# Altium PCB Main.PcbDoc
Units mil, origin at the board's own origin, x right, y up, seen from the top; angles counter-clockwise.
Board outline 3050 x 1750 mil, 4 copper layers (Top Layer, GND, 5V0, Bottom Layer), stack 23.756 mil thick; 22 components, 31 nets, 140 pads, 35 vias.
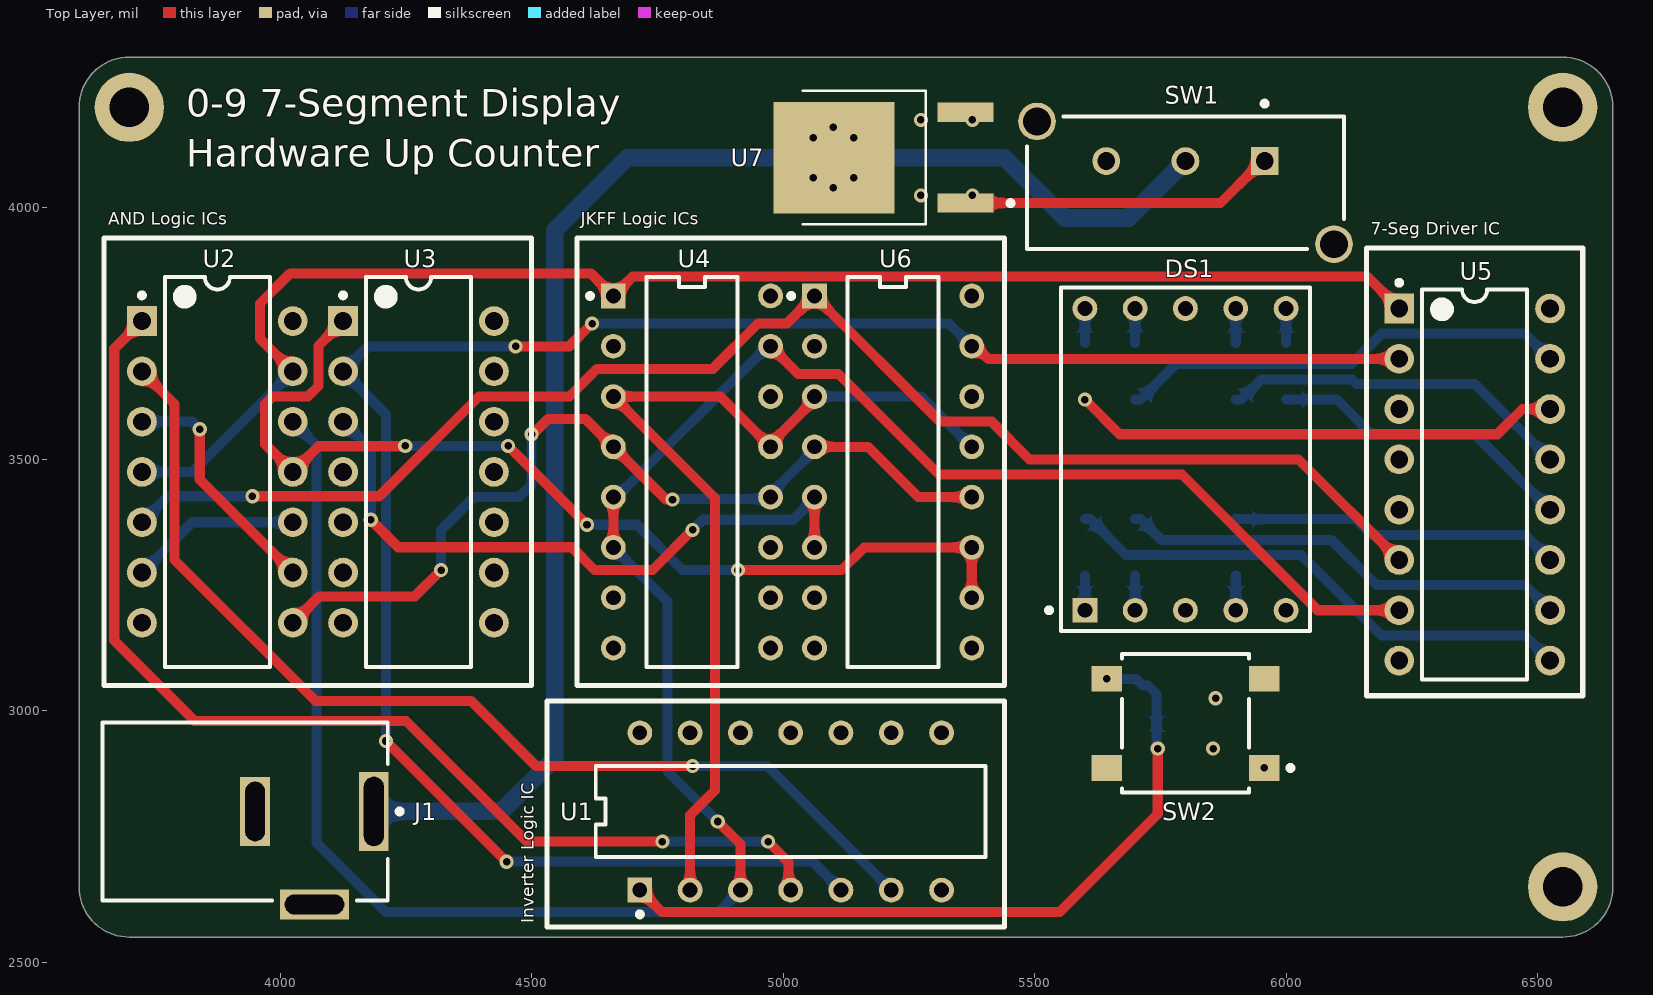
[diagram p0: Top Layer view]
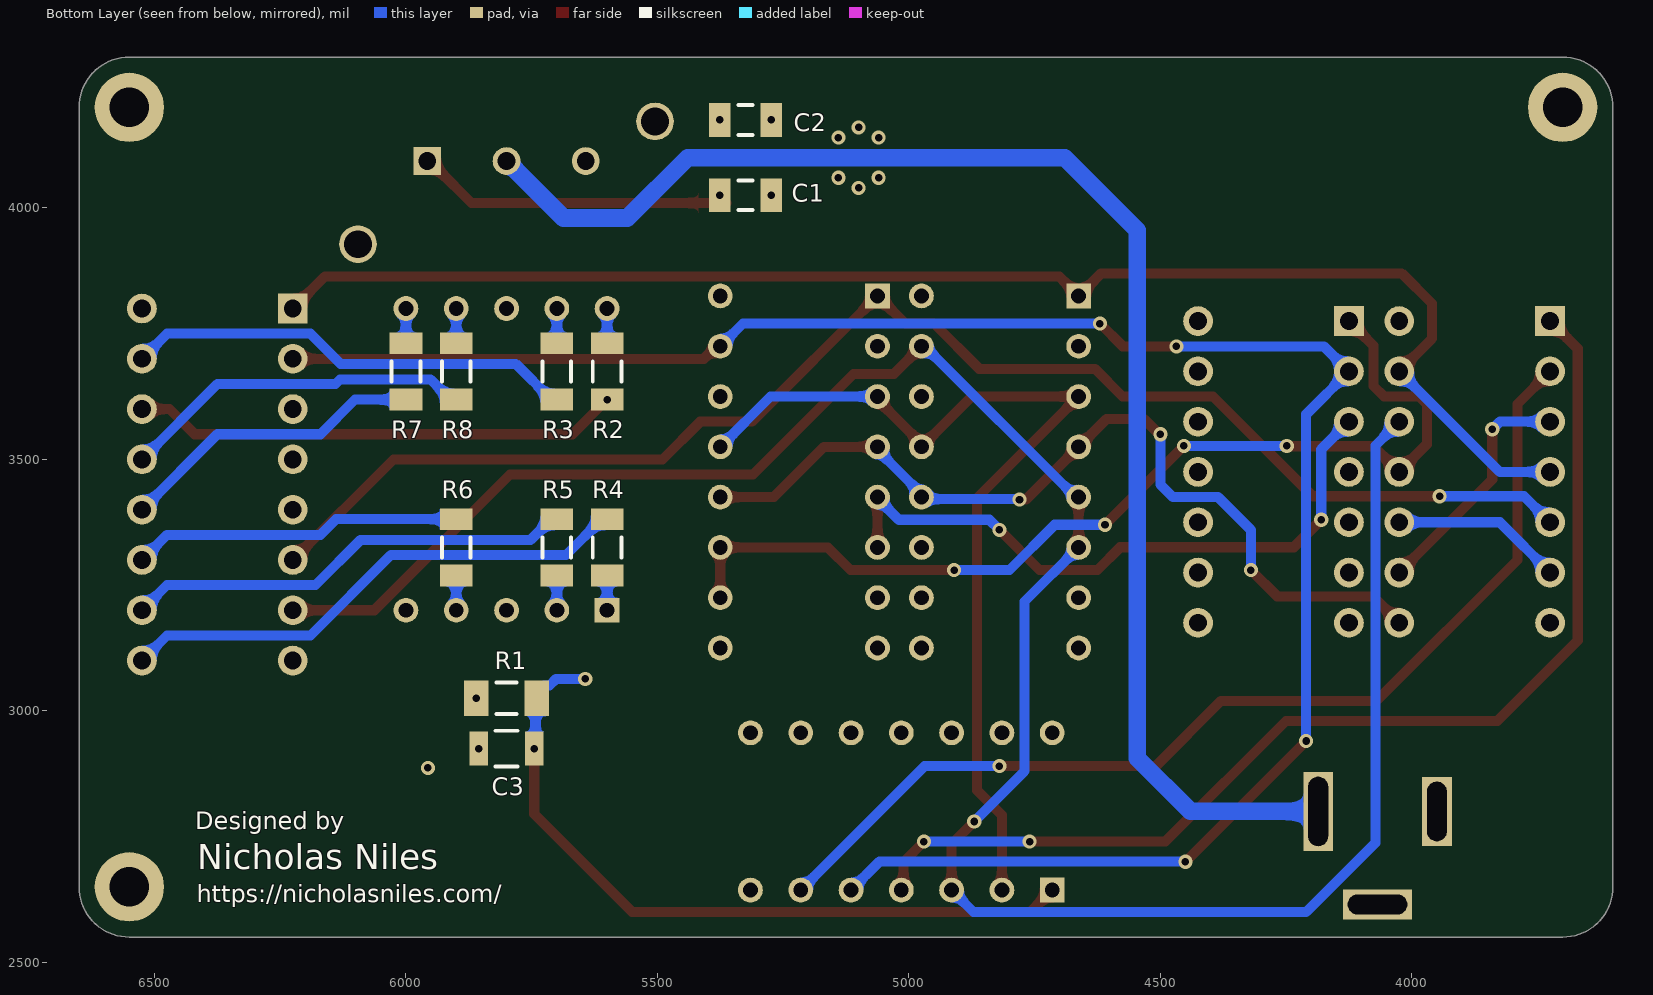
[diagram p1: Bottom Layer view, seen from below]
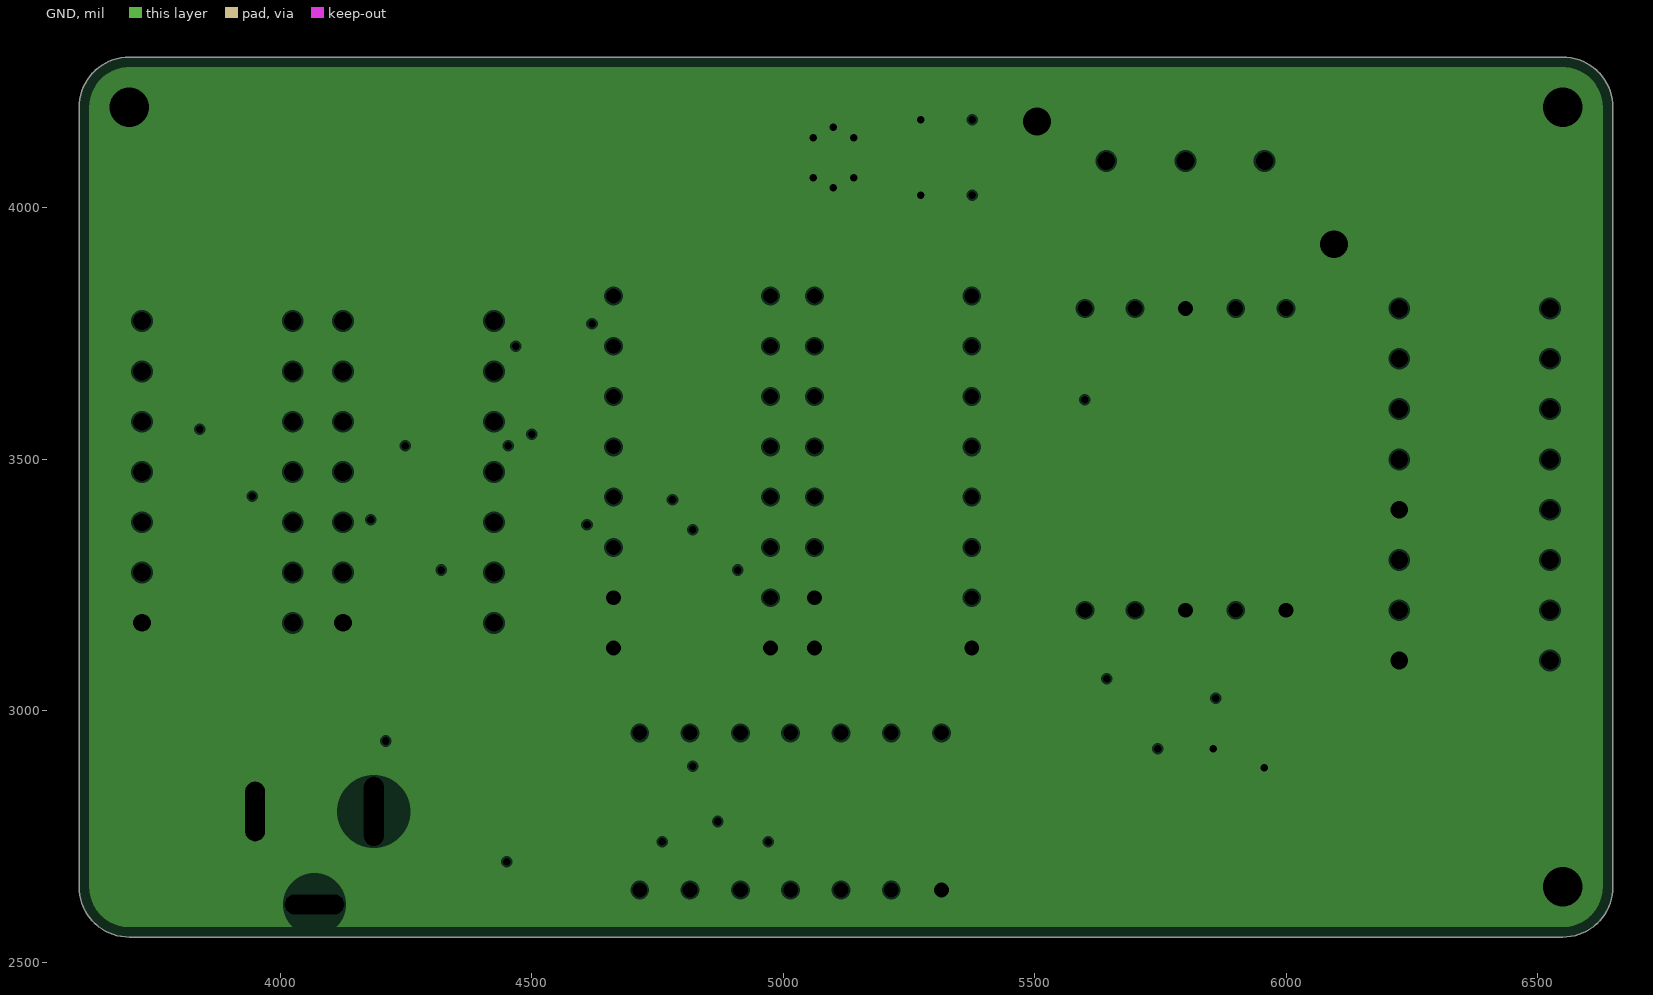
[diagram p2: GND, clearances drawn from the general rule]
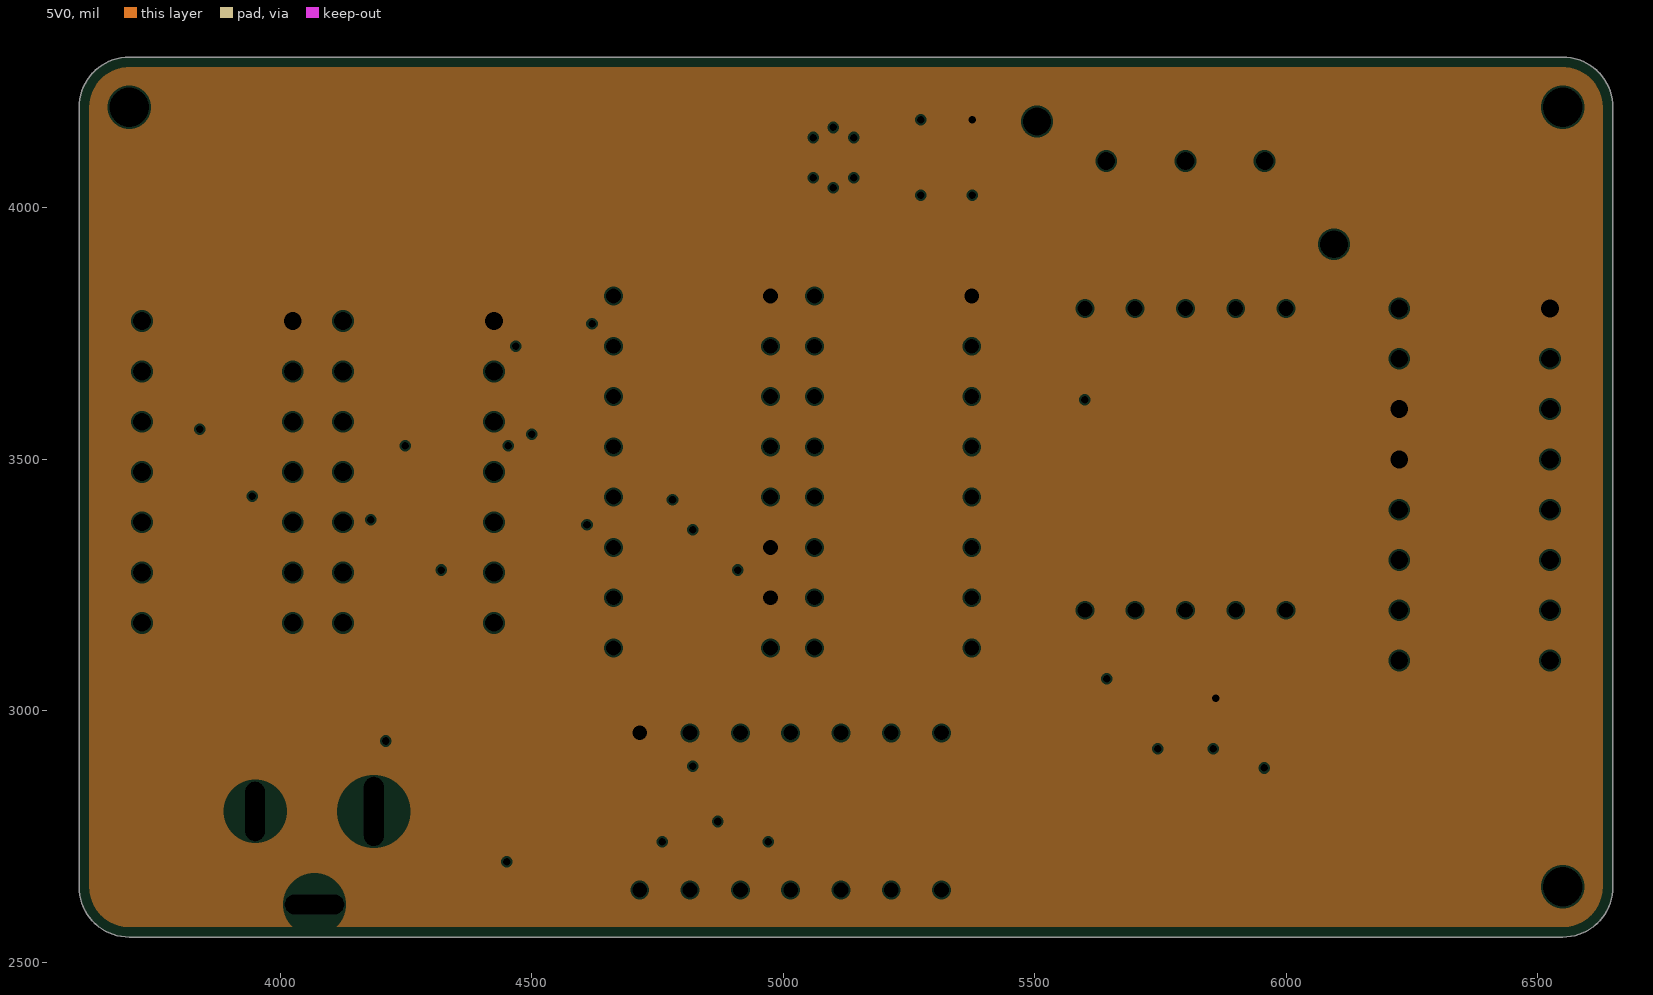
[diagram p3: 5V0, clearances drawn from the general rule]
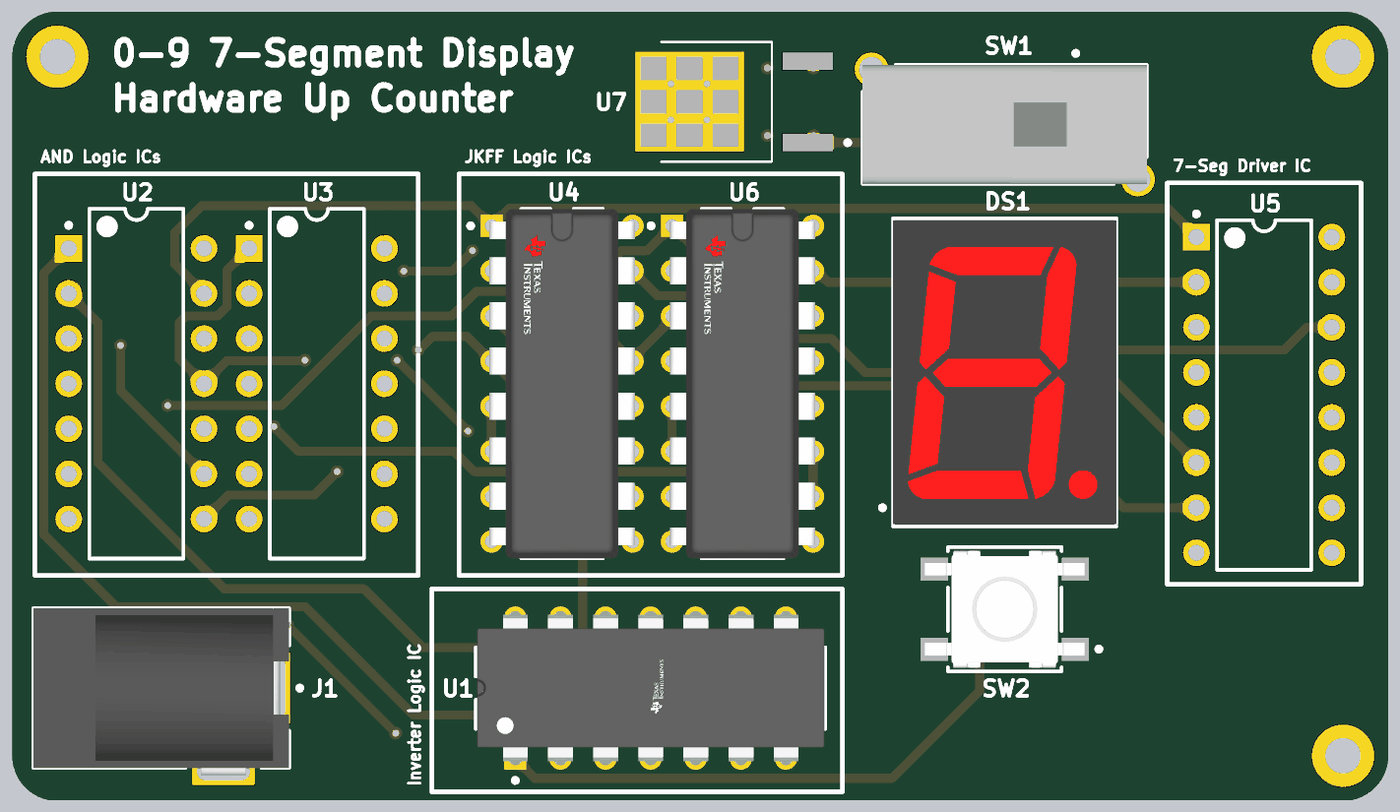
[diagram p4: 3D render of the assembled board from above, using the file's embedded part models]

## Layer stack, top to bottom
Top Solder: solder mask 0.4, Solder Resist, Dk 3.5
Top Layer: signal copper 1.4
Dielectric 2: prepreg 2.8, PP-006, Dk 4.1
GND: plane copper 1.378, net GND
Dielectric 1: dielectric 12.6, FR-4, Dk 4.8
5V0: plane copper 1.378, net 5V0
Dielectric 3: prepreg 2.8, PP-006, Dk 4.1
Bottom Layer: signal copper 1.4
Bottom Solder: solder mask 0.4, Solder Resist, Dk 3.5

## Board outline
3600,2650 3600,4200 cw(c3700,4200) 3700,4300 6550,4300 cw(c6550,4200) 6650,4200 6650,2650 cw(c6550,2650) 6550,2550 3700,2550 cw(c3700,2650)

## Design rules (kind name [scope] priority, off if disabled: settings)
BoardOutlineClearance [All] p1: gap=7.87 ignorepadtopadclearanceinfootprint=FALSE
Clearance [All] p1: gap=4 ignorepadtopadclearanceinfootprint=TRUE except(5: Arc-Via Track-Via SMDPad-Via THPad-Via Via-Via Via-Fill Via-Poly Via-Region Via-Text; 10: Arc-Hole Track-Hole SMDPad-Hole THPad-Hole Via-Hole Fill-Hole Poly-Hole Region-Hole Text-Hole)
ComponentClearance [All] p1: gap=4 collisioncheckmode=3 verticalgap=4 showdistances=TRUE
DiffPairsRouting [All] p1: maxlimit=4 minlimit=4 mostfreqgap=4 toplayer_minwidth=4 toplayer_maxwidth=71497.94 toplayer_prefwidth=4 bottomlayer_minwidth=4 bottomlayer_maxwidth=71497.94 bottomlayer_prefwidth=4 maxuncoupledlength=500
Height [All] p1: minheight=0 maxheight=71497.94 prefheight=500
HoleSize [All] p1: absolutevalues=TRUE maxlimit=248.03 minlimit=7.87 maxpercent=80.000 minpercent=20.000
HoleToHoleClearance [All] p1: gap=10 allowstackedmicrovias=FALSE
MinimumAnnularRing [All] p1: minimumring=6
MinimumSolderMaskSliver [All] p1: minsoldermaskwidth=6
PlaneClearance [All] p1: clearance=4
PlaneConnect PlaneConnectPowerPads [InPadClass('PowerPads')] p1: planeconnectstyle=Direct reliefexpansion=20 reliefentries=4 reliefconductorwidth=10 reliefairgap=10
PlaneConnect [All] p2: pad.planeconnectstyle=Relief pad.reliefexpansion=11.81 pad.reliefentries=4 pad.reliefconductorwidth=4 pad.reliefairgap=4 via.planeconnectstyle=Direct via.reliefexpansion=11.81 via.reliefentries=4 via.reliefconductorwidth=5 via.reliefairgap=5
PolygonConnect PolygonConnectPowerPads [All vs (InPadClass('PowerPads'))] p1: connectstyle=Direct reliefconductorwidth=10 reliefentries=4 polygonreliefangle="90 Angle" airgapwidth=10
PolygonConnect [All] p2: thpad.connectstyle=Relief thpad.reliefconductorwidth=4 thpad.reliefentries=4 thpad.polygonreliefangle="90 Angle" thpad.airgapwidth=4 smdpad.connectstyle=Relief smdpad.reliefconductorwidth=4 smdpad.reliefentries=4 smdpad.polygonreliefangle="90 Angle" smdpad.airgapwidth=4 via.connectstyle=Direct via.reliefconductorwidth=5 via.reliefentries=4 via.polygonreliefangle="90 Angle" via.airgapwidth=5
RoutingVias [All] p1: holewidth=7.87 width=17.72 viastyle="Through Hole" minholewidth=7.87 minwidth=17.72 maxholewidth=248.03 maxwidth=257.87
SilkToSilkClearance [All] p1: silktosilkclearance=5
SilkToSolderMaskClearance [IsPad] p1: minsilkscreentomaskgap=5 clearancetoexposedcopper=TRUE
SolderMaskExpansion [All] p1: expansion=2 istentingtop=FALSE
SupplyNets "Schematic Supply Nets_2" [InNet('Vin')] p1: voltage=0.000
SupplyNets "Schematic Supply Nets_1" [InNet('GND')] p2: voltage=0.000
SupplyNets "Schematic Supply Nets" [InNet('5V0')] p3: voltage=0.000
UnRoutedNet [All] p1: checkbadconnections=TRUE
Width Power_20mil [All] p1: maxlimit=1000 minlimit=20 preferedwidth=20 minimp=50.000000 maximp=50.000000 favimp=50.000000
Width Power_12mil [All] p2: maxlimit=1000 minlimit=12 preferedwidth=12 minimp=50.000000 maximp=50.000000 favimp=50.000000
Width Width_10mil [All] p3: maxlimit=1000 minlimit=10 preferedwidth=10 minimp=50.000000 maximp=50.000000 favimp=50.000000
Width Width_6mil [All] p4: maxlimit=1000 minlimit=6 preferedwidth=6 minimp=50.000000 maximp=50.000000 favimp=50.000000
Width Width_4mil [All] p5: maxlimit=1000 minlimit=4 preferedwidth=4 minimp=50.000000 maximp=50.000000 favimp=50.000000
19 further rules are at their usual default settings.

## Components (designator, comment, footprint, x,y, rotation, side; value= is the part's Value field where it differs from the comment)
C1 "1µF" CAPC3216X110X50LL20T25 5325,4025 r180 bottom
C2 "1µF" CAPC3216X110X50LL20T25 5325,4175 r180 bottom
C3 "100nF" FP-C1206C-EB-MFG 5800,2925 r0 bottom value="0.10 μF"
DS1 "HDSP-H153" FP-HDSP-H153-MFG 5800,3500 r0 top
J1 "PJ-002A" CUI-PJ-002A_V 4068.11,2800 r180 top
R1 "10kΩ" RESC3116X65X40ML10T20 5800,3025 r0 bottom
R2 "330Ω" RESC3216X70X50NL05T20 5600,3675 r270 bottom
R3 "330Ω" RESC3216X70X50NL05T20 5700,3675 r270 bottom
R4 "330Ω" RESC3216X70X50NL05T20 5600,3325 r90 bottom
R5 "330Ω" RESC3216X70X50NL05T20 5700,3325 r90 bottom
R6 "330Ω" RESC3216X70X50NL05T20 5900,3325 r90 bottom
R7 "330Ω" RESC3216X70X50NL05T20 6000,3675 r270 bottom
R8 "330Ω" RESC3216X70X50NL05T20 5900,3675 r270 bottom
SW1 "1825255-1" TECO-1825255-1_V 5800,4050 r180 top
SW2 "B3S-1000P" FP-B3S-1000P-MFG 5800,2975 r180 top
U1 "SN74HCT14N" FP-N0014A-MFG 5015,2800 r90 top
U2 "SN74HC08N" N0014A 3875,3475 r0 top
U3 "SN74HC08N" N0014A 4275,3475 r0 top
U4 "CD4027BE" FP-N0016A-MFG 4818.7,3475 r0 top
U5 "CD74HCT4511E" N0016A 6375,3450 r0 top
U6 "CD4027BE" FP-N0016A-MFG 5218.7,3475 r0 top
U7 "VIN->5V0" DPAK229P990X238-4N 5200,4100 r90 top

## Footprints (in the part's own frame and the unit in brackets; to place one, negate y for a bottom-side part, rotate by r counter-clockwise, add the part's x,y. Pads: shape width x height; smd on the part's side, far side on the other; paste and mask are expansions set on the pad)
CAPC3216X110X50LL20T25 [mm] "Chip Capacitor, 2-Leads, Body 3.20x1.60mm, IPC High Density"
  rect 1.1x1.7 smd: 1(-1.3,0) 2(1.3,0)
  silkscreen extent -0.35,-0.75 0.35,0.75, body extent -1.7,-0.9 1.7,0.9, height 1.1
CUI-PJ-002A_V [mm] "THD, 3-Leads, Body 14.4x9mm, Height 11mm"
  rect 1.5x4 hole 1 slot 3.5 at 90 deg: 1(-3,0)
  rect 1.5x3.5 hole 1 slot 3 at 90 deg: 2(3,0)
  rect 3.5x1.5 hole 1 slot 3 at 0 deg: 3(0,4.7)
  silkscreen extent -4.43,-4.5 10.7,4.5, body extent -3.7,-4.5 10.7,4.9, height 11
DPAK229P990X238-4N [mm]
  rect 0.97x2.83 smd: 1(-2.29,-4.14) 3(2.29,-4.14)
  rect 5.63x6.09 smd paste-4: 2(0,2.51)
  silkscreen extent -3.37,-6.5 3.37,4.09
FP-B3S-1000P-MFG [mm]
  rect 1.55x1.3 smd paste+0 mask+0: 1(-3.975,2.25) 2(3.975,2.25) 3(-3.975,-2.25) 4(3.975,-2.25)
  silkscreen extent -5.43,-3.5 3.2,3.5, body extent -4.85,-3.6 4.85,3.6, height 0.25
FP-C1206C-EB-MFG [mm]
  rect 0.95x1.7 smd paste+0 mask+0: 1(-1.4,0) 2(1.4,0)
  silkscreen extent -0.55,-0.9 0.55,0.9, body extent -1.6,-0.8 1.6,0.8, height 0.88
FP-HDSP-H153-MFG [mm]
  rect 1.25x1.25 hole 0.75 paste-2539.97 mask+0: 1(-5.08,-7.62)
  round 1.25 hole 0.75 paste-2539.97 mask+0: 2(-2.54,-7.62) 3(0,-7.62) 4(2.54,-7.62) 5(5.08,-7.62) 6(5.08,7.62) 7(2.54,7.62) 8(0,7.62) 9(-2.54,7.62) 10(-5.08,7.62)
  silkscreen extent -7.01,-8.67 6.29,8.67, body extent -6.39,-8.77 6.39,8.77, height 0.25
FP-N0014A-MFG [mm]
  rect 1.25x1.25 hole 0.75 paste-2539.97 mask+0: 1(-3.97,7.62)
  round 1.25 hole 0.75 paste-2539.97 mask+0: 2(-3.97,5.08) 3(-3.97,2.54) 4(-3.97,0) 5(-3.97,-2.54) 6(-3.97,-5.08) 7(-3.97,-7.62) 8(3.97,-7.62) 9(3.97,-5.08) 10(3.97,-2.54) 11(3.97,0) 12(3.97,2.54) 13(3.97,5.08) 14(3.97,7.62)
  silkscreen extent -5.32,-9.84 2.3,9.84, body extent -4.69,-9.94 4.69,9.94, height 0.25
FP-N0016A-MFG [mm]
  rect 1.25x1.25 hole 0.75 paste-2539.97 mask+0: 1(-3.97,8.89)
  round 1.25 hole 0.75 paste-2539.97 mask+0: 2(-3.97,6.35) 3(-3.97,3.81) 4(-3.97,1.27) 5(-3.97,-1.27) 6(-3.97,-3.81) 7(-3.97,-6.35) 8(-3.97,-8.89) 9(3.97,-8.89) 10(3.97,-6.35) 11(3.97,-3.81) 12(3.97,-1.27) 13(3.97,1.27) 14(3.97,3.81) 15(3.97,6.35) 16(3.97,8.89)
  silkscreen extent -5.27,-9.84 2.3,9.84, body extent -4.69,-9.94 4.69,9.94, height 0.25
N0014A [mm] "DIP, 14-Leads, Body 19.7x6.6mm, Pitch 2.54mm"
  rect 1.5x1.5 hole 0.9: 1(-3.81,7.62)
  round 1.5 hole 0.9: 2(-3.81,5.08) 3(-3.81,2.54) 4(-3.81,0) 5(-3.81,-2.54) 6(-3.81,-5.08) 7(-3.81,-7.62) 8(3.81,-7.62) 9(3.81,-5.08) 10(3.81,-2.54) 11(3.81,0) 12(3.81,2.54) 13(3.81,5.08) 14(3.81,7.62)
  silkscreen extent -3.93,-9.85 2.65,9.85, body extent -3.95,-9.85 3.95,9.85, height 5.08
N0016A [mm] "DIP, 16-Leads, Body 19.7x6.6mm, Pitch 2.54mm"
  rect 1.5x1.5 hole 0.9: 1(-3.81,8.89)
  round 1.5 hole 0.9: 2(-3.81,6.35) 3(-3.81,3.81) 4(-3.81,1.27) 5(-3.81,-1.27) 6(-3.81,-3.81) 7(-3.81,-6.35) 8(-3.81,-8.89) 9(3.81,-8.89) 10(3.81,-6.35) 11(3.81,-3.81) 12(3.81,-1.27) 13(3.81,1.27) 14(3.81,3.81) 15(3.81,6.35) 16(3.81,8.89)
  silkscreen extent -3.93,-9.85 2.65,10.31, body extent -3.95,-9.85 3.95,9.85, height 5.08
RESC3116X65X40ML10T20 [mm] "Chip Resistor, 2-Leads, Body 3.10x1.60mm, IPC Low Density"
  rect 1.25x1.8 smd: 1(-1.525,0) 2(1.525,0)
  silkscreen extent -0.5,-0.8 0.5,0.8, body extent -1.6,-0.85 1.6,0.85, height 0.65
RESC3216X70X50NL05T20 [mm] "Chip Resistor, 2-Leads, Body 3.20x1.60mm, IPC Medium Density"
  rect 1.1x1.65 smd: 1(-1.425,0) 2(1.425,0)
  silkscreen extent -0.5,-0.72 0.5,0.72, body extent -1.63,-0.82 1.62,0.82, height 0.7
TECO-1825255-1_V [mm] "THD, 5-Leads, Body 6.7x16mm, Pitch 4mm"
  rect 1.4x1.4 hole 0.9: 1(-4,-1.1)
  round 1.4 hole 0.9: 2(0,-1.1) 3(4,-1.1)
  round 1.9 hole 1.4: MH1(-7.5,3.1) MH2(7.5,-3.1)
  silkscreen extent -8,-4.12 8,3.35, body extent -8,-3.35 8,3.35, height 12

## Part data
C1 C2: library part CMP-2000-06011-1, "Chip Capacitor, 1 uF, +/- 10%, 50 V, -55 to 125 degC, 1206 (3216 Metric), RoHS, Tape and Reel", Capacitance=1uF, Capacitance - nF=1000nF, Case Code - in=1206, Case Code - mm=3216, Case Height=1mm, Case Length=3.2mm, Case Width=1.6mm, Dielectric=X7R, Manufacturer=Kemet, Maximum Operating Temperature=+125C, Minimum Operating Temperature=-55C, Operating Temperature Range=-55Cto+125C, Package / Case=1206(3216metric), Package Description="2-Pin Surface Mount Device, Body 3.2 x 1.6 mm", Temperature Coefficient / Code=+/-15%, Tolerance=10%, Voltage Rating=50V, Brand=Kemet, Class=Class1, Datasheet URL=http://www.kemet.com/docfinder?Partnumber=C1206C105K5RACTU, Datasheet Version=02/2016, Dimensions=1.6mmWx3.2mmLx1mmH, Factory Pack Quantity=2500, Manufacturer URL=http://www.kemet.com/, Mounting Technology=SurfaceMount, Package Reference=1206, Packaging=Reel, Product=GeneralTypeMLCCs, Product Category=MultilayerCeramicCapacitorsMLCC-SMD/SMT, RoHS=Details, Series=C1206C, Termination Style=SMD/SMT, Type=SMDMLCCX7R6.3-250VDCCommericalGrade, Voltage Rating DC=50V
C3: library part CMP-1037-04222-2, "CAP CER 0.1UF 200V 10% X7R 1206", Capacitance="0.10 μF", Manufacturer=KEMET, Manufacturer Part Number=C1206C104K2RACTU, Package=C1206C-EB, Temperature="-55°C to +150°C", Temperature Characteristic=X7R, Temperature Coefficient=15%, Temperature Range High=+150°C, Temperature Range Low=-55°C, Tolerance=0.1, Voltage Rating="200 V", Automotive=Yes, Automotive Grade="Grade 0", Category=Cap, ComponentLink2Description=Datasheet, ComponentLink2URL=https://content.kemet.com/datasheets/KEM_C1007_X8R_ULTRA_150C_SMD.pdf, Device Class L1="Passive Components", Device Class L2=Capacitors, Device Class L3="Ceramic Capacitors", Digikey Description="CAP CER 0.1UF 200V 10% X7R 1206", Height=0.88mm, Ipc Land Pattern Name=CAPC320160X78, Lead Free=Yes, Material=Ceramic, Mouser Description="Multilayer Ceramic Capacitors MLCC - SMD/SMT 200volts 0.1uF X7R 10%", Octopart=https://octopart.com/c1206c104k2ractu-kemet-9138344, RoHS=TRUE
DS1: library part CMP-18395-000002-1, "LED 7-SEG 14.2MM CC RED RHD RHD", Forward Current=100mA, Forward Voltage=2V, Manufacturer=Broadcom, Power Dissipation=96mW, Reverse Voltage=15V, Temperature="-20°C to +100°C", Temperature Range High=+100°C, Temperature Range Low=-20°C, Automotive=No, Category=Disp, ComponentLink2Description=Datasheet, ComponentLink2URL=https://docs.broadcom.com/docs/AV02-1107EN, Device Class L1=Optoelectronics, Device Class L2=Displays, Device Class L3="LED Displays", Digikey Description="LED 7-SEG 14.2MM CC RED RHD RHD", Display Type=LED, Element Config="Common Cathode", Height=8mm, Lead Free=Yes, Luminous Intensity=16mcd, Manufacturer Part Number=HDSP-H153, Octopart=https://octopart.com/hdsp-h153-broadcom-71129578, Package=HDSP-H153, RoHS=TRUE, Standoff Height=1.14mm, Test Current=100mA, Viewing Angle=100°, Wavelength=637nm
J1: library part CMP-2000-06895-2, "Through Hole Right Angle DC Power Jack, 2.5 A, 2 mm Center Pin, 3 Position, -25 to 85 degC, RoHS, Bulk", Current Rating=2.5A, Flammability Rating=UL94V-0, Insulation Resistance=50MOhms, Manufacturer=CUIInc., Operating Temperature Range=-25Cto+85C, Package Description="3-Pin Through Hole Device, Body 14.4 x 9 mm, Height 11 mm", Voltage Rating=24V, Brand=CUI, Connector Type=DCPowerJack, Contact Gender=Male, Contact Material=Copper, Contact Plating=Nickel, Datasheet URL=http://www.cui.com/product/resource/pj-002a.pdf, Datasheet Version="Rev. 1.03, 04/2016", Factory Pack Quantity=500, Housing Material=PolybutyleneTerephthalate(PBT), Inside Contact Diameter=2mm, Manufacturer URL=http://www.cui.com/, Mounting Angle=Right, Mounting Style=ThroughHole, Mounting Technology=ThroughHole, Outside Contact Diameter=6.5mm, Package Reference=PJ-002A, Product=Jacks, Product Category=DCPowerConnectors, RoHS=True, Termination Style=ThroughHole
R1: library part CMP-1014-00623-2, "Chip Resistor, 10 KOhm, +/- 1%, 0.25 W, -55 to 155 degC, 1206 (3216 Metric), RoHS, Tape and Reel", Case Code (Imperial)=1206, Case Code (Metric)=3216, Manufacturer=Yageo, Max Operating Temperature=155degC, Min Operating Temperature=-55degC, Package Description="2-Pin Surface Mount Device, Body 3.1 x 1.6 mm", Package Quantity=5000, Package Reference=1206.0, Power Rating=250mW, Resistance=10KOhm, Temperature Coefficient=100ppm/degreesC, Tolerance=1%, Voltage Rating=200V, Case/Package=1206, Composition=ThickFilm, Datasheet URL=http://www.yageo.com/NewPortal/yageodocoutput?fileName=/pdf/R-Chip/PYu-RC_Group_51_RoHS_L_5.pdf, Datasheet Version="Rev. 5, 10/2016", Depth=1.6mm, Height=0.55mm, Lead Free=LeadFree, Length=3.1mm, Manufacturer URL=http://www.yageo.com/, Military Standard=Not, Packaging=TapeandReel, REACH SVHC=Unknown, RoHSCompliant=true, Termination=SMD/SMT, Width=1.6mm
R2 R3 R4 R5 R6 R7 R8: library part CMP-2003-00307-1, Manufacturer=Panasonic, Part Number=ERJ8ENF3300V
SW1: library part CMP-2100-03576-1, "Slide Switch, SPDT, 125 V, -20 to 85 degC, 5-Pin THD, RoHS, Tray", Case/Package=300, Current Rating=300mA, Flammability Rating=UL94HB, Manufacturer="TE Connectivity", Max Operating Temperature=85degC, Max Voltage Rating (AC)=125V, Min Operating Temperature=-20degC, Operating Force=600gf, Package Description="5-Pin Through Hole Device, Body 6.7 x 16 mm, Pitch 4 mm", Package Quantity=560, Actuator Length=4.5mm, Contact Material=Copper, Contact Plating=Silver, Contact Style=Shorting, Datasheet URL=http://www.te.com/commerce/DocumentDelivery/DDEController?Action=showdoc&DocId=Customer+Drawing%7F1825255%7FA4%7Fpdf%7FEnglish%7FENG_CD_1825255_A4_baseFilename.pdf%7F1825255-1, Datasheet Version="Rev. A4, 03/2014", Depth=6.7mm, Electrical Life=15000Cycles, ELV=Compliant, Lead Free=LeadFree, Length=16mm, Manufacturer URL=http://www.te.com/, Max Current Rating=300mA, Mount=ThroughHole, Number of Positions=2, Orientation=Vertical, Package Reference=1825255-1, Packaging=Bulk, Radiation Hardening=No, REACH SVHC=Unknown, RoHSCompliant=true, Switch Travel=4mm, Termination=PCPins, Throw Configuration=SPDT, Voltage Rating (AC)=125V
SW2: library part CMP-08834-000008-1, "SWITCH TACTILE SPST-NO 0.05A 24V", Contact Current Rating=50mA, Contact Resistance=100mR, Max Operating Temperature=70°C, Max Voltage Rating (DC)=24V, Min Operating Temperature=-25°C, Operating Force=1.57N, Package Quantity=1, Ratings=IP67, Actuator Length=0.8mm, Actuator Type=Standard, Contact Material=Bronze, Contact Plating=Silver, Current Rating=50mA, Depth=9mm, Electrical Life=500000Cycles, Height=3.65mm, Illumination Type=Non-Illuminated, Lead Free="Lead Free", Length=6.6mm, Max Current Rating=50mA, Mechanical Life=500000Cycles, Mount="Surface Mount", Number of Poles=1, Orientation=Straight, Packaging="Tape and Reel", Radiation Hardening=No, REACH SVHC="No SVHC", Switch Function=Off-Mom, Switch Travel=0.25mm, Termination="Gull Wing", Throw Configuration=SPST, Voltage Rating (DC)=24V, Weight=0.010582oz, Width=6mm
U1: library part CMP-1615-00871-4, "IC INVERTER SCHMITT 6CH 14DIP", Case/Package=PDIP, High Level Output Current=-4mA, Low Level Output Current=4mA, Max Operating Temperature=85°C, Max Supply Voltage=5.5V, Min Operating Temperature=-40°C, Min Supply Voltage=4.5V, Operating Supply Voltage=5V, Package Quantity=25, Quiescent Current=2uA, Contact Plating=Gold, Height=4.57mm, Input Type="SCHMITT TRIGGER", Lead Free="Lead Free", Length=19.3mm, Logic Function=Buffer, Max Output Current=4mA, Mount="Through Hole", Number of Bits=6, Number of Circuits=6, Number of Elements=6, Number of Gates=6, Number of Inputs=1, Number of Pins=14, Output Current=4mA, Packaging=Rail/Tube, Propagation Delay=30ns, Radiation Hardening=No, REACH SVHC="No SVHC", RoHS Compliant=Yes, Schmitt Trigger Input=Yes, Series=74HCT, Technology=CMOS, Turn-On Delay Time=40ns, Weight=0.032734oz, Width=6.35mm
U2 U3: library part CMP-0777-00250-3, "Quadruple 2-Input Positive-AND Gates, N0014A, TUBE", F @ Nom Voltage(Max)(Mhz)=70, Generic Part Number=SN74HC08, ICC @ Nom Voltage(Max)(mA)=0.02, Manufacturer="Texas Instruments", Operating Temperature Range(C)="-40 to 85", Rating=Catalog, tpd @ Nom Voltage(Max)(ns)=28, Voltage(Nom)(V)=5, Bits(#)=4, DatasheetVersion=SCLS081F, Input Type=CMOS, Output Type=CMOS, PackageReference=N0014A, Schmitt Trigger=No, Technology Family=HC, VCC(Max)(V)=6, VCC(Min)(V)=2
U4 U6: library part CMP-04902-000022-1, "IC FF JK TYPE DUAL 1BIT 16DIP", Case/Package=PDIP, Frequency=24MHz, High Level Output Current=-4.2mA, Input Capacitance=5pF, Low Level Output Current=4.2mA, Max Operating Temperature=125°C, Max Supply Voltage=18V, Min Operating Temperature=-55°C, Min Supply Voltage=3V, Operating Supply Voltage=3.3V, Output Current=6.8mA, Package Quantity=25, Power Dissipation=500mW, Quiescent Current=20uA, Clock Edge Trigger Type="Positive Edge", Contact Plating=Gold, Height=4.57mm, Input Type=SINGLE-ENDED, Lead Free="Lead Free", Length=19.3mm, Logic Function=Flip-Flop, Max Frequency=24MHz, Mount="Through Hole", Number of Bits=2, Number of Bits per Element=1, Number of Circuits=2, Number of Elements=2, Number of Input Lines=2, Number of Output Lines=1, Number of Pins=16, Packaging=Rail/Tube, Polarity=Non-Inverting, Propagation Delay=300ns, Radiation Hardening=No, REACH SVHC="No SVHC", RoHS Compliant=Yes, Series=4000B, Technology=CMOS, Turn-On Delay Time=45ns, Weight=0.03357oz, Width=6.35mm
U5: library part CMP-0388-00318-2, "High Speed CMOS Logic BCD-to-7-Segment Latch / Decoder / Driver, 4.5 to 5.5 V, -55 to 125 degC, 16-pin DIP (N16), Pb-Free (RoHS)", Manufacturer="Texas Instruments", Rating=Catalog, Code_JEDEC=MS-001, ComponentLink1Description="Manufacturer URL", ComponentLink1URL=http://www.ti.com/, ComponentLink2Description=Datasheet, ComponentLink2URL=http://www.ti.com/general/docs/lit/getliterature.tsp?genericPartNumber=CD74HCT4511&fileType=pdf, ComponentLink3Description="Package Specification", ComponentLink3URL=http://www.ti.com/litv/pdf/mpdi002c, DatasheetVersion=SCHS279D, Eco-Plan="Pb-Free (RoHS)", Mounting Technology="Through Hole", PackageDescription="16-Pin Plastic In-Line, Body 19.305 x 6.35 mm, Pitch 2.54 mm", PackageReference=N0016A, PackageVersion=4040049/E, PartNumber=CD74HCT4511E, SubFamily="Discrete Segment LED Driver", Vin(Max)(V)=5.5, Vin(Min)(V)=4.5
U7: library part MC7805BDTRKG, "Linear Voltage Regulator IC 1 Output 1A DPAK", Package="TO-252-3 Freescale Semiconductor", Availability=Unavailable, MF="ON Semiconductor", MP=MC7805BDTRKG, Price=None, SnapEDA_Link=https://www.snapeda.com/parts/MC7805BDTRKG/ON%20Semiconductor/view-part/360207/?ref=snap

## Free pads (board coordinates)
  round 137.79 hole 78.74: 7(3700,4200) 7(6550,2650) 7(6550,4200)

## Via types
v1: diameter 28, hole 15, Top Layer to Bottom Layer, tented both sides, 35 vias

## Nets (pads, with @x,y where several pads share a name; then routed paths per layer and width w, separated by ;. In a path a pad name is that pad's centre, name@x,y a point inside that pad or via, vN(x,y) a via of type N, cw(c..) or ccw(c..) an arc to the next point about the centre after c; other vN are vias at no path point)
5V0: C2.1 R1.2 U1.14 U2.14 U3.14 U4.10 U4.11 U4.16 U5.3 U5.4 U5.16 U6.16 U7.3
  other v1: 5860.04,3025 5376.18,4175
a: DS1.7 R8.1 | length 68.9
  Bottom Layer w20: R8.1 DS1.7
b: DS1.6 R7.1 | length 68.9
  Bottom Layer w20: R7.1 DS1.6
c: DS1.4 R6.1 | length 68.9
  Bottom Layer w20: DS1.4 R6.1
d: DS1.2 R5.1 | length 68.9
  Bottom Layer w20: DS1.2 R5.1
e: DS1.1 R4.1 | length 68.9
  Bottom Layer w20: DS1.1 R4.1
f: DS1.9 R3.1 | length 68.9
  Bottom Layer w20: R3.1 DS1.9
g: DS1.10 R2.1 | length 68.9
  Bottom Layer w20: R2.1 DS1.10
GND: C1.2 C2.2 C3.2 DS1.3 DS1.5 DS1.8 J1.2 pad.7 SW1.MH1 SW1.MH2 SW2.1 U1.7 U2.7 U3.7 U4.7 U4.8 U4.9 U5.5 U5.8 U6.7 U6.8 U6.9 U7.2
  other v1: 5956.5,2886.42 5855.12,2925 5273.82,4025 5100,4040 5060,4060 5140,4060 5060,4140 5140,4140 5100,4160 5273.82,4175
JK[2]: U2.11 U3.1 U6.10 U6.11 | length 2020.5
  Top Layer w20: U3.1 4075.96,3725.96 4075.96,3645.96 4055.4,3625.4 3985.4,3625.4 3970,3610 3970,3530 U2.11 4076.13,3526.13 4247.78,3526.13 v1(4248.64,3526.99) ; v1(4453.01,3526.99) v1(4610,3370) ; v1(4910,3280) 5116.05,3280 5161.05,3325 U6.11 U6.10
  Bottom Layer w20: v1(4248.64,3526.99) v1(4453.01,3526.99) ; v1(4610,3370) 4710,3370 4800,3280 v1(4910,3280)
JK[3]: U3.3 U6.5 U6.6 | length 1303.2
  Top Layer w20: v1(4180,3380) 4234.7,3325.3 4579.7,3325.3 4625,3280 4740,3280 v1(4820,3360) ; U6.6 U6.5
  Bottom Layer w20: U3.3 4180,3520 v1(4180,3380) ; v1(4820,3360) 4840,3380 5020,3380 5062.4,3422.4 U6.5
NetC1_1: C1.1 SW1.1 U7.1 | length 615.3
  Top Layer w20: U7.1 5869.84,4009.84 5935.75,4075.75 5939.92,4075.75 5944.79,4080.61 SW1.1@5944.79,4084.79
  other v1: 5376.18,4025
NetC3_1: C3.1 R1.1 SW2.4 U1.1 | length 1479.6
  Top Layer w20: U1.1 4758.7,2600 5550,2600 5744.88,2794.88 v1(5744.88,2925)
  Bottom Layer w20: v1(5643.5,3063.58) 5701.38,3063.58 5714.53,3050.43 5725.35,3050.43 5742.42,3033.37 5742.42,2927.46 v1(5744.88,2925)
NetR2_2: R2.2 U5.14 | length 974.2
  Top Layer w20: v1(5600,3618.9) 5668.9,3550 6420,3550 6470,3600 U5.14
NetR3_2: R3.2 U5.15 | length 900
  Bottom Layer w20: R3.2 5710.83,3618.9 5781.93,3690 6130,3690 6190,3750 6475,3750 U5.15
NetR4_2: R4.2 U5.9 | length 1041.4
  Bottom Layer w20: R4.2 5610.83,3381.1 5681.93,3310 6030,3310 6190,3150 6475,3150 U5.9
NetR5_2: R5.2 U5.10 | length 900
  Bottom Layer w20: R5.2 5710.83,3381.1 5751.93,3340 6090,3340 6180,3250 6475,3250 U5.10
NetR6_2: R6.2 U5.11 | length 658.6
  Bottom Layer w20: R6.2 6138.9,3381.1 6170,3350 6475,3350 U5.11
NetR7_2: R7.2 U5.12 | length 615.7
  Bottom Layer w20: R7.2 6101.1,3618.9 6170,3550 6375,3550 U5.12
NetR8_2: R8.2 U5.13 | length 707.3
  Bottom Layer w20: R8.2 5910.83,3618.9 5950.76,3658.84 6131.16,3658.84 6140,3650 6375,3650 U5.13
NetU1_2: U1.2 U4.3 U4.13 U6.3 U6.13 | length 1929.6
  Top Layer w20: U1.2 4815,2792.64 4864.33,2841.97 4864.33,3423.08 U4.3 4875,3625 U4.13 4975,3531.3 5062.4,3618.7 U6.3
  Bottom Layer w20: U6.3 5275,3625 U6.13
NetU2_8: U2.8 U4.4 U4.12 U6.4 U6.12 | length 1781.8
  Top Layer w20: U2.8 4077.67,3227.67 4267.67,3227.67 v1(4320,3280) ; v1(4500,3550) 4502.16,3550 4532.16,3580 4607.4,3580 U4.4 4767.4,3420 v1(4780,3420) ; U6.4 5168.7,3525 5268.7,3425 U6.12
  Bottom Layer w20: v1(4320,3280) 4320,3360 4384.92,3424.92 4474.92,3424.92 4500,3450 v1(4500,3550) ; v1(4780,3420) 4780.96,3420.96 4970.96,3420.96 U4.12 4975,3431.3 5062.4,3518.7 U6.4
Q[0]: U1.3 U2.12 U4.5 U4.6 U4.15 U5.7 | length 4565
  Top Layer w20: U4.6 U4.5 ; v1(4870,2780) 4915,2735 U1.3 ; U4.15 5030,3670 5110,3670 5310,3470 5792.95,3470 6062.95,3200 U5.7
  Bottom Layer w20: U2.12 4072.24,3527.76 4072.24,2737.76 4210,2600 4871.3,2600 U1.3 ; U4.6 4770,3217.4 4770,2880 v1(4870,2780) ; U4.5 4668.7,3425 4968.7,3725 U4.15
Q[0]Bar: U1.4 U2.1 | length 2238.4
  Top Layer w20: U2.1 3670,3720 3670,3140 3830,2980 4250,2980 4490,2740 v1(4760,2740) ; v1(4970,2740) 5010.34,2699.66 5010.34,2648.36 U1.4
  Bottom Layer w20: v1(4760,2740) v1(4970,2740)
Q[1]: U2.4 U2.13 U4.1 U5.1 | length 2895.6
  Top Layer w20: U2.13 3960,3740 3960,3810 4020,3870 4617.4,3870 U4.1 4701.01,3863.61 6161.39,3863.61 U5.1
  Bottom Layer w20: U2.4 3825,3475 U2.13
Q[2]: U1.5 U3.2 U5.2 U6.15 | length 3966.3
  Top Layer w20: v1(4210,2940) v1(4450,2700) ; v1(4468.1,3724.83) 4574.83,3724.83 v1(4620,3770) ; U6.15 5382.9,3725 5407.9,3700 U5.2
  Bottom Layer w20: v1(4210,2940) 4210,3590 U3.2 4174.83,3724.83 v1(4468.1,3724.83) ; v1(4450,2700) 5058.7,2700 U1.5 ; v1(4620,3770) 5330,3770 U6.15
Q[2]Bar: U1.6 U2.2 | length 2098.8
  Top Layer w20: U2.2 3790,3610 3790,3300 4070,3020 4379.32,3020 4509.32,2890 v1(4820,2890)
  Bottom Layer w20: v1(4820,2890) 4968.7,2890 U1.6
Q[3]: U2.5 U5.6 U6.1 | length 2903.9
  Top Layer w20: v1(3944.5,3426.68) 4196.68,3426.68 4395.11,3625.11 4575.11,3625.11 4630,3680 4860,3680 4950,3770 5007.4,3770 U6.1 5312.4,3575 5415,3575 5490,3500 6025,3500 U5.6
  Bottom Layer w20: U2.5 3776.68,3426.68 v1(3944.5,3426.68)
RST1: U2.3 U2.9 | length 482.8
  Top Layer w20: v1(3840,3560) 3840,3460 U2.9
  Bottom Layer w20: U2.3 3825,3575 v1(3840,3560)
RST2: U2.6 U2.10 | length 341.4
  Bottom Layer w20: U2.6 3825,3375 U2.10
Vin: J1.1 SW1.2 | length 2864
  Bottom Layer w35: J1.1 4440,2800 4545.65,2905.65 4545.65,3955.65 4690,4100 5440,4100 5560,3980 5686.69,3980 SW1.2
pads on no net: J1.3 SW1.3 SW2.2 SW2.3 U1.8 U1.9 U1.10 U1.11 U1.12 U1.13 U3.4 U3.5 U3.6 U3.8 U3.9 U3.10 U3.11 U3.12 U3.13 U4.2 U4.14 U6.2 U6.14

## Polygon pours and split planes (outlines as drawn)
GND on GND (split plane): 6557.84,4279.61 6565.61,4278.46 6573.22,4276.55 6580.61,4273.91 6587.71,4270.55 6594.44,4266.51 6600.75,4261.84 6606.57,4256.57 6611.84,4250.75 6616.51,4244.44 6620.55,4237.71 6623.91,4230.61 6626.55,4223.22 6628.46,4215.61 6629.61,4207.84 6629.97,4200.63 6629.9,4200 6629.9,2650 6629.97,2649.37 6629.61,2642.16 6628.46,2634.39 6626.55,2626.78 6623.91,2619.39 6620.55,2612.29 6616.51,2605.56 6611.84,2599.25 6606.57,2593.43 6600.75,2588.16 6594.44,2583.49 6587.71,2579.45 6580.61,2576.09 6573.22,2573.45 6565.61,2571.54 6557.84,2570.39 6550.63,2570.03 6550,2570.1 3700,2570.1 3699.37,2570.03 3692.16,2570.39 3684.39,2571.54 3676.78,2573.45 3669.39,2576.09 3662.29,2579.45 3655.56,2583.49 3649.25,2588.16 3643.43,2593.43 3638.16,2599.25 3633.49,2605.56 3629.45,2612.29 3626.09,2619.39 3623.45,2626.78 3621.54,2634.39 3620.39,2642.16 3620.03,2649.37 3620.1,2650 3620.1,4200 3620.03,4200.63 3620.39,4207.84 3621.54,4215.61 3623.45,4223.22 3626.09,4230.61 3629.45,4237.71 3633.49,4244.44 3638.16,4250.75 3643.43,4256.57 3649.25,4261.84 3655.56,4266.51 3662.29,4270.55 3669.39,4273.91 3676.78,4276.55 3684.39,4278.46 3692.16,4279.61 3699.37,4279.97 3700,4279.9 6550,4279.9 6550.63,4279.97
5V0 on 5V0 (split plane): 6557.84,4279.61 6565.61,4278.46 6573.22,4276.55 6580.61,4273.91 6587.71,4270.55 6594.44,4266.51 6600.75,4261.84 6606.57,4256.57 6611.84,4250.75 6616.51,4244.44 6620.55,4237.71 6623.91,4230.61 6626.55,4223.22 6628.46,4215.61 6629.61,4207.84 6629.97,4200.63 6629.9,4200 6629.9,2650 6629.97,2649.37 6629.61,2642.16 6628.46,2634.39 6626.55,2626.78 6623.91,2619.39 6620.55,2612.29 6616.51,2605.56 6611.84,2599.25 6606.57,2593.43 6600.75,2588.16 6594.44,2583.49 6587.71,2579.45 6580.61,2576.09 6573.22,2573.45 6565.61,2571.54 6557.84,2570.39 6550.63,2570.03 6550,2570.1 3700,2570.1 3699.37,2570.03 3692.16,2570.39 3684.39,2571.54 3676.78,2573.45 3669.39,2576.09 3662.29,2579.45 3655.56,2583.49 3649.25,2588.16 3643.43,2593.43 3638.16,2599.25 3633.49,2605.56 3629.45,2612.29 3626.09,2619.39 3623.45,2626.78 3621.54,2634.39 3620.39,2642.16 3620.03,2649.37 3620.1,2650 3620.1,4200 3620.03,4200.63 3620.39,4207.84 3621.54,4215.61 3623.45,4223.22 3626.09,4230.61 3629.45,4237.71 3633.49,4244.44 3638.16,4250.75 3643.43,4256.57 3649.25,4261.84 3655.56,4266.51 3662.29,4270.55 3669.39,4273.91 3676.78,4276.55 3684.39,4278.46 3692.16,4279.61 3699.37,4279.97 3700,4279.9 6550,4279.9 6550.63,4279.97

## Silkscreen, mask and mechanical layers (free items; w line width, h text height)
Top Overlay:
  lines w10: 3650,3050 4500,3050 4500,3940 3650,3940 3650,3050 ; 4530,2570 5440,2570 5440,3020 4530,3020 4530,2570 ; 4590,3050 5440,3050 5440,3940 4590,3940 4590,3050 ; 6160,3030 6590,3030 6590,3920 6160,3920 6160,3030
  text "0-9 7-Segment Display" at 3813,4181.67 h55
  text "Hardware Up Counter" at 3813,4081.67 h55
  text "AND Logic ICs" at 3658,3966.33 h25
  text "JKFF Logic ICs" at 4598,3966.33 h25
  text "7-Seg Driver IC" at 6168,3946.33 h25
  text "Inverter Logic IC" at 4503.67,2578 h25 r90
Bottom Overlay:
  text "Designed by" at 6418.69,2764.66 h35
  text "Nicholas Niles" at 6414.89,2685 h50
  text "https://nicholasniles.com/" at 6415.7,2619.66 h35
Mechanical 1:
  the board outline again, w10